# Altium PCB Rev5.PcbDoc (part 3 of 4)
Units mil, origin at the board's own origin, x right, y up, seen from the top; angles counter-clockwise.
Board outline 3019 x 2316 mil, 2 copper layers (Top Layer, Bottom Layer); 26 components, 37 nets, 159 pads, 132 vias.
Unrouted connection lines stored in the file: 2.
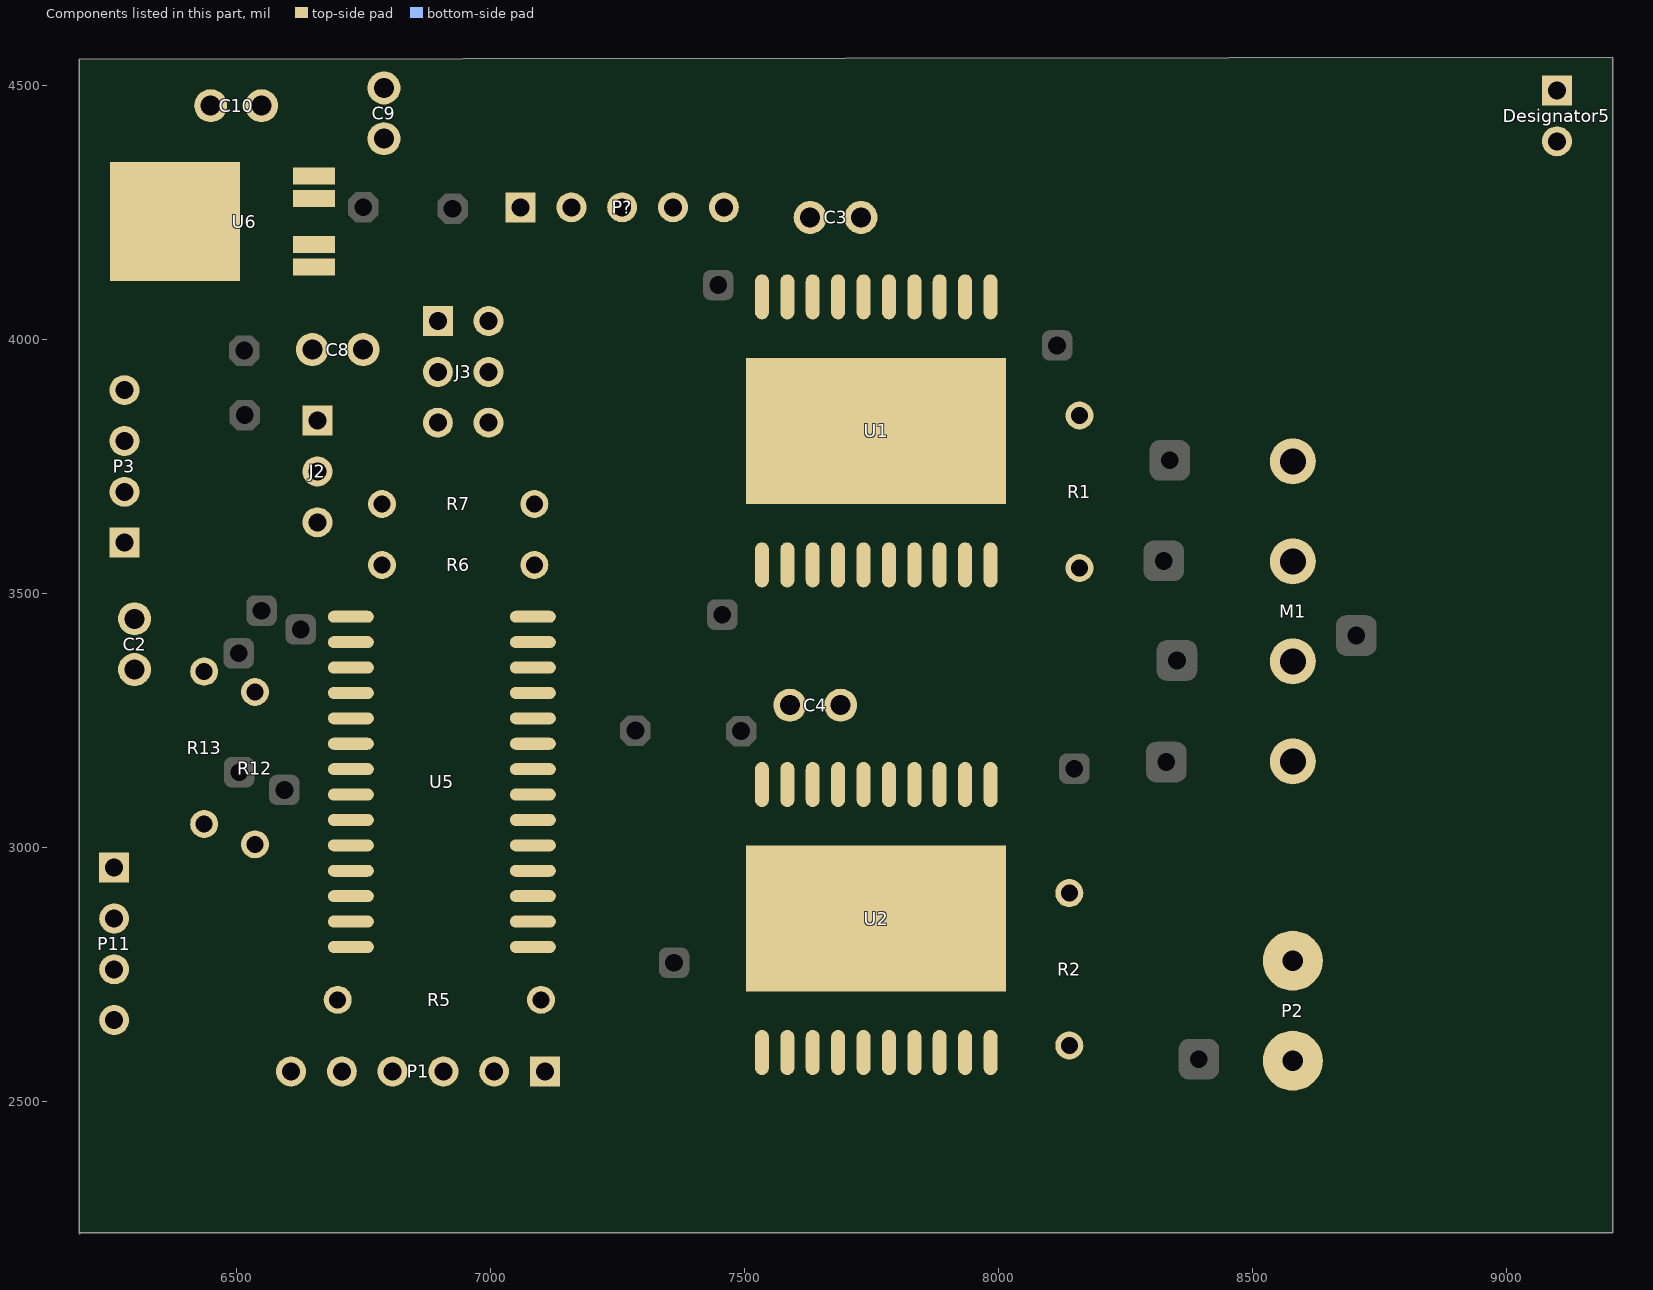
[diagram p3: the components of this part, seen from the top]

## Via types
v1: diameter 25.98, hole 12.99, Top Layer to Bottom Layer, tented top, 132 vias

## Nets (pads, with @x,y where several pads share a name; then routed paths per layer and width w, separated by ;. In a path a pad name is that pad's centre, name@x,y a point inside that pad or via, vN(x,y) a via of type N, cw(c..) or ccw(c..) an arc to the next point about the centre after c; other vN are vias at no path point) (continued)
copper on no net: (continued)
  Bottom Layer w1.3: 8423,3970.4 8636.2,3970.4 ; 8423,3971.7 8636.2,3971.7 ; 8423,3973 8636.2,3973 ; 8423,3974.3 8634.9,3974.3 ; 8423,3975.6 8634.9,3975.6 ; 8423,3976.9 8634.9,3976.9 ; 8423,3978.2 8633.6,3978.2 ; 8423,3979.5 8633.6,3979.5 ; 8423,3980.8 8632.3,3980.8 ; 8423,3982.1 8632.3,3982.1 ; 8423,3983.4 8632.3,3983.4 ; 8423,3984.7 8631,3984.7 ; 8423,3986 8631,3986 ; 8423,3987.3 8631,3987.3 ; 8423,3988.6 8629.7,3988.6 ; 8423,3989.9 8629.7,3989.9 ; 8423,3991.2 8628.4,3991.2 ; 8423,3992.5 8628.4,3992.5 ; 8423,3993.8 8628.4,3993.8 ; 8423,3995.1 8627.1,3995.1 ; 8423,3996.4 8627.1,3996.4 ; 8423,3997.7 8627.1,3997.7 ; 8423,3999 8625.8,3999 ; 8423,4000.3 8625.8,4000.3 ; 8423,4001.6 8624.5,4001.6 ; 8423,4002.9 8624.5,4002.9 ; 8423,4004.2 8624.5,4004.2 ; 8423,4005.5 8623.2,4005.5 ; 8423,4006.8 8623.2,4006.8 ; 8423,4008.1 8621.9,4008.1 ; 8423,4009.4 8621.9,4009.4 ; 8423,4010.7 8621.9,4010.7 ; 8423,4012 8620.6,4012 ; 8423,4013.3 8620.6,4013.3 ; 8423,4014.6 8619.3,4014.6 ; 8423,4015.9 8619.3,4015.9 ; 8423,4017.2 8618,4017.2 ; 8423,4018.5 8618,4018.5 ; 8423,4019.8 8618,4019.8 ; 8423,4021.1 8616.7,4021.1 ; 8423,4022.4 8616.7,4022.4 ; 8423,4023.7 8615.4,4023.7 ; 8423,4025 8615.4,4025 ; 8423,4026.3 8615.4,4026.3 ; 8423,4027.6 8614.1,4027.6 ; 8423,4028.9 8614.1,4028.9 ; 8423,4030.2 8612.8,4030.2 ; 8423,4031.5 8612.8,4031.5 ; 8423,4032.8 8611.5,4032.8 ; 8423,4034.1 8611.5,4034.1 ; 8423,4035.4 8611.5,4035.4 ; 8423,4036.7 8610.2,4036.7 ; 8423,4038 8610.2,4038 ; 8423,4039.3 8608.9,4039.3 ; 8423,4040.6 8607.6,4040.6 ; 8423,4041.9 8607.6,4041.9 ; 8423,4043.2 8606.3,4043.2 ; 8423,4044.5 8606.3,4044.5 ; 8423,4045.8 8606.3,4045.8 ; 8423,4047.1 8605,4047.1 ; 8423,4048.4 8605,4048.4 ; 8423,4049.7 8603.7,4049.7 ; 8423,4051 8603.7,4051 ; 8423,4052.3 8603.7,4052.3 ; 8423,4053.6 8602.4,4053.6 ; 8423,4054.9 8602.4,4054.9 ; 8423,4056.2 8602.4,4056.2 ; 8423,4057.5 8602.4,4057.5 ; 8423,4058.8 8601.1,4058.8 ; 8423,4060.1 8601.1,4060.1 ; 8423,4061.4 8599.8,4061.4 ; 8423,4062.7 8599.8,4062.7 ; 8423,4064 8599.8,4064 ; 8425.6,4065.3 8599.8,4065.3 ; 8428.2,4066.6 8598.5,4066.6 ; 8432.1,4067.9 8598.5,4067.9 ; 8434.7,4069.2 8598.5,4069.2 ; 8439.9,4070.5 8598.5,4070.5 ; 8443.8,4071.8 8597.2,4071.8 ; 8447.7,4073.1 8597.2,4073.1 ; 8451.6,4074.4 8597.2,4074.4 ; 8455.5,4075.7 8597.2,4075.7 ; 8459.4,4077 8597.2,4077 ; 8462,4078.3 8597.2,4078.3 ; 8467.2,4079.6 8597.2,4079.6 ; 8471.1,4080.9 8597.2,4080.9 ; 8475,4082.2 8595.9,4082.2 ; 8480.2,4083.5 8595.9,4083.5 ; 8482.8,4084.8 8595.9,4084.8 ; 8484.1,4348.7 8597.2,4348.7 ; 8484.1,4350 8597.2,4350 ; 8484.1,4351.3 8597.2,4351.3 ; 8484.1,4352.6 8597.2,4352.6 ; 8484.1,4353.9 8597.2,4353.9 ; 8484.1,4355.2 8597.2,4355.2 ; 8484.1,4356.5 8597.2,4356.5 ; 8484.1,4357.8 8597.2,4357.8 ; 8484.1,4359.1 8597.2,4359.1 ; 8484.1,4360.4 8597.2,4360.4 ; 8484.1,4361.7 8597.2,4361.7 ; 8484.1,4363 8597.2,4363 ; 8484.1,4364.3 8597.2,4364.3 ; 8484.1,4365.6 8597.2,4365.6 ; 8484.1,4366.9 8597.2,4366.9 ; 8484.1,4376 8595.9,4376 ; 8484.1,4377.3 8595.9,4377.3 ; 8484.1,4378.6 8595.9,4378.6 ; 8484.1,4379.9 8595.9,4379.9 ; 8485.4,4338.3 8598.5,4338.3 ; 8485.4,4339.6 8598.5,4339.6 ; 8485.4,4340.9 8598.5,4340.9 ; 8485.4,4342.2 8598.5,4342.2 ; 8485.4,4343.5 8598.5,4343.5 ; 8485.4,4344.8 8598.5,4344.8 ; 8485.4,4346.1 8598.5,4346.1 ; 8485.4,4347.4 8597.2,4347.4 ; 8485.4,4368.2 8595.9,4368.2 ; 8485.4,4369.5 8595.9,4369.5 ; 8485.4,4370.8 8595.9,4370.8 ; 8485.4,4372.1 8595.9,4372.1 ; 8485.4,4373.4 8595.9,4373.4 ; 8485.4,4374.7 8595.9,4374.7 ; 8485.4,4381.2 8595.9,4381.2 ; 8485.4,4382.5 8595.9,4382.5 ; 8485.4,4383.8 8595.9,4383.8 ; 8485.4,4385.1 8595.9,4385.1 ; 8485.4,4386.4 8595.9,4386.4 ; 8485.4,4387.7 8595.9,4387.7 ; 8485.4,4389 8595.9,4389 ; 8485.4,4390.3 8595.9,4390.3 ; 8485.4,4391.6 8594.6,4391.6 ; 8485.4,4392.9 8594.6,4392.9 ; 8485.4,4394.2 8593.3,4394.2 ; 8485.4,4395.5 8593.3,4395.5 ; 8486.7,4333.1 8598.5,4333.1 ; 8486.7,4334.4 8598.5,4334.4 ; 8486.7,4335.7 8598.5,4335.7 ; 8486.7,4337 8598.5,4337 ; 8486.7,4396.8 8593.3,4396.8 ; 8486.7,4398.1 8593.3,4398.1 ; 8488,4086.1 8595.9,4086.1 ; 8488,4327.9 8598.5,4327.9 ; 8488,4329.2 8598.5,4329.2 ; 8488,4330.5 8598.5,4330.5 ; 8488,4331.8 8598.5,4331.8 ; 8488,4399.4 8592,4399.4 ; 8488,4400.7 8592,4400.7 ; 8489.3,4318.8 8598.5,4318.8 ; 8489.3,4320.1 8598.5,4320.1 ; 8489.3,4321.4 8598.5,4321.4 ; 8489.3,4322.7 8598.5,4322.7 ; 8489.3,4324 8598.5,4324 ; 8489.3,4325.3 8598.5,4325.3 ; 8489.3,4326.6 8598.5,4326.6 ; 8489.3,4402 8592,4402 ; 8489.3,4403.3 8592,4403.3 ; 8490.6,4087.4 8595.9,4087.4 ; 8490.6,4317.5 8598.5,4317.5 ; 8490.6,4404.6 8592,4404.6 ; 8490.6,4405.9 8593.3,4405.9 ; 8491.9,4307.1 8594.6,4307.1 ; 8491.9,4308.4 8594.6,4308.4 ; 8491.9,4309.7 8595.9,4309.7 ; 8491.9,4311 8595.9,4311 ; 8491.9,4312.3 8597.2,4312.3 ; 8491.9,4313.6 8597.2,4313.6 ; 8491.9,4314.9 8598.5,4314.9 ; 8491.9,4316.2 8598.5,4316.2 ; 8491.9,4407.2 8593.3,4407.2 ; 8491.9,4408.5 8594.6,4408.5 ; 8493.2,4295.4 8590.7,4295.4 ; 8493.2,4296.7 8590.7,4296.7 ; 8493.2,4298 8590.7,4298 ; 8493.2,4299.3 8590.7,4299.3 ; 8493.2,4300.6 8592,4300.6 ; 8493.2,4301.9 8592,4301.9 ; 8493.2,4303.2 8592,4303.2 ; 8493.2,4304.5 8593.3,4304.5 ; 8493.2,4305.8 8593.3,4305.8 ; 8493.2,4409.8 8594.6,4409.8 ; 8493.2,4411.1 8595.9,4411.1 ; 8493.2,4412.4 8598.5,4412.4 ; 8493.2,4413.7 8603.7,4413.7 ; 8493.2,4415 8606.3,4415 ; 8493.2,4416.3 8657,4416.3 ; 8494.5,4291.5 8592,4291.5 ; 8494.5,4292.8 8590.7,4292.8 ; 8494.5,4294.1 8590.7,4294.1 ; 8494.5,4417.6 8659.6,4417.6 ; 8494.5,4418.9 8662.2,4418.9 ; 8494.5,4420.2 8673.9,4420.2 ; 8495.8,4088.7 8594.6,4088.7 ; 8495.8,4277.2 8594.6,4277.2 ; 8495.8,4278.5 8594.6,4278.5 ; 8495.8,4279.8 8594.6,4279.8 ; 8495.8,4281.1 8594.6,4281.1 ; 8495.8,4282.4 8592,4282.4 ; 8495.8,4283.7 8592,4283.7 ; 8495.8,4285 8592,4285 ; 8495.8,4286.3 8592,4286.3 ; 8495.8,4287.6 8592,4287.6 ; 8495.8,4288.9 8592,4288.9 ; 8495.8,4290.2 8592,4290.2 ; 8495.8,4421.5 8679.1,4421.5 ; 8497.1,4269.4 8597.2,4269.4 ; 8497.1,4270.7 8597.2,4270.7 ; 8497.1,4272 8597.2,4272 ; 8497.1,4273.3 8595.9,4273.3 ; 8497.1,4274.6 8595.9,4274.6 ; 8497.1,4275.9 8595.9,4275.9 ; 8497.1,4422.8 8685.6,4422.8 ; 8498.4,4265.5 8597.2,4265.5 ; 8498.4,4266.8 8597.2,4266.8 ; 8498.4,4268.1 8597.2,4268.1 ; 8498.4,4424.1 8693.4,4424.1 ; 8498.4,4425.4 8701.2,4425.4 ; 8498.4,4426.7 8702.5,4426.7 ; 8499.7,4090 8594.6,4090 ; 8499.7,4261.6 8598.5,4261.6 ; 8499.7,4262.9 8598.5,4262.9 ; 8499.7,4264.2 8598.5,4264.2 ; 8499.7,4428 8702.5,4428 ; 8501,4259 8598.5,4259 ; 8501,4260.3 8598.5,4260.3 ; 8501,4429.3 8703.8,4429.3 ; 8501,4430.6 8705.1,4430.6 ; 8502.3,4091.3 8594.6,4091.3 ; 8502.3,4257.7 8599.8,4257.7 ; 8502.3,4431.9 8706.4,4431.9 ; 8502.3,4433.2 8707.7,4433.2 ; 8503.6,4255.1 8599.8,4255.1 ; 8503.6,4256.4 8599.8,4256.4 ; 8503.6,4434.5 8710.3,4434.5 ; 8503.6,4435.8 8714.2,4435.8 ; 8504.9,4246 8519.2,4246 ; 8504.9,4247.3 8520.5,4247.3 ; 8504.9,4248.6 8521.8,4248.6 ; 8504.9,4249.9 8523.1,4249.9 ; 8504.9,4251.2 8524.4,4251.2 ; 8504.9,4252.5 8528.3,4252.5 ; 8504.9,4253.8 8533.5,4253.8 ; 8504.9,4437.1 8733.7,4437.1 ; 8506.2,4092.6 8594.6,4092.6 ; 8506.2,4242.1 8517.9,4242.1 ; 8506.2,4243.4 8517.9,4243.4 ; 8506.2,4244.7 8519.2,4244.7 ; 8506.2,4438.4 8735,4438.4 ; 8507.5,4238.2 8516.6,4238.2 ; 8507.5,4239.5 8516.6,4239.5 ; 8507.5,4240.8 8516.6,4240.8 ; 8507.5,4439.7 8736.3,4439.7 ; 8507.5,4441 8736.3,4441 ; 8508.8,4222.6 8514,4222.6 ; 8508.8,4223.9 8514,4223.9 ; 8508.8,4225.2 8514,4225.2 ; 8508.8,4226.5 8514,4226.5 ; 8508.8,4227.8 8514,4227.8 ; 8508.8,4229.1 8514,4229.1 ; 8508.8,4230.4 8514,4230.4 ; 8508.8,4231.7 8515.3,4231.7 ; 8508.8,4233 8515.3,4233 ; 8508.8,4234.3 8515.3,4234.3 ; 8508.8,4235.6 8515.3,4235.6 ; 8508.8,4236.9 8515.3,4236.9 ; 8510.1,4217.4 8515.3,4217.4 ; 8510.1,4218.7 8515.3,4218.7 ; 8510.1,4220 8515.3,4220 ; 8510.1,4221.3 8515.3,4221.3 ; 8510.1,4442.3 8737.6,4442.3 ; 8511.4,4093.9 8594.6,4093.9 ; 8511.4,4212.2 8517.9,4212.2 ; 8511.4,4213.5 8517.9,4213.5 ; 8511.4,4214.8 8516.6,4214.8 ; 8511.4,4216.1 8516.6,4216.1 ; 8511.4,4443.6 8737.6,4443.6 ; 8511.4,4444.9 8757.1,4444.9 ; 8512.7,4210.9 8517.9,4210.9 ; 8512.7,4446.2 8759.7,4446.2 ; 8514,4095.2 8594.6,4095.2 ; 8514,4208.3 8519.2,4208.3 ; 8514,4209.6 8519.2,4209.6 ; 8514,4447.5 8762.3,4447.5 ; 8515.3,4205.7 8520.5,4205.7 ; 8515.3,4207 8520.5,4207 ; 8515.3,4448.8 8763.6,4448.8 ; 8516.6,4203.1 8521.8,4203.1 ; 8516.6,4204.4 8520.5,4204.4 ; 8516.6,4450.1 8764.9,4450.1 ; 8517.9,4096.5 8594.6,4096.5 ; 8517.9,4200.5 8523.1,4200.5 ; 8517.9,4201.8 8523.1,4201.8 ; 8517.9,4451.4 8767.5,4451.4 ; 8517.9,4452.7 8768.8,4452.7 ; 8519.2,4197.9 8525.7,4197.9 ; 8519.2,4199.2 8524.4,4199.2 ; 8520.5,4195.3 8527,4195.3 ; 8520.5,4196.6 8525.7,4196.6 ; 8520.5,4217.4 8525.7,4217.4 ; 8520.5,4218.7 8525.7,4218.7 ; 8520.5,4220 8525.7,4220 ; 8520.5,4221.3 8525.7,4221.3 ; 8520.5,4222.6 8525.7,4222.6 ; 8520.5,4223.9 8525.7,4223.9 ; 8520.5,4225.2 8525.7,4225.2 ; 8520.5,4226.5 8525.7,4226.5 ; 8520.5,4227.8 8525.7,4227.8 ; 8520.5,4229.1 8525.7,4229.1 ; 8520.5,4230.4 8525.7,4230.4 ; 8520.5,4231.7 8525.7,4231.7 ; 8520.5,4233 8525.7,4233 ; 8520.5,4234.3 8525.7,4234.3 ; 8520.5,4235.6 8527,4235.6 ; 8520.5,4454 8770.1,4454 ; 8521.8,4097.8 8594.6,4097.8 ; 8521.8,4194 8528.3,4194 ; 8521.8,4213.5 8527,4213.5 ; 8521.8,4214.8 8527,4214.8 ; 8521.8,4216.1 8527,4216.1 ; 8521.8,4236.9 8527,4236.9 ; 8521.8,4238.2 8528.3,4238.2 ; 8521.8,4455.3 8771.4,4455.3 ; 8521.8,4456.6 8775.3,4456.6 ; 8521.8,4457.9 8823.4,4457.9 ; 8523.1,4191.4 8529.6,4191.4 ; 8523.1,4192.7 8529.6,4192.7 ; 8523.1,4209.6 8529.6,4209.6 ; 8523.1,4210.9 8528.3,4210.9 ; 8523.1,4212.2 8528.3,4212.2 ; 8523.1,4239.5 8528.3,4239.5 ; 8523.1,4240.8 8529.6,4240.8 ; 8523.1,4459.2 8822.1,4459.2 ; 8523.1,4460.5 8820.8,4460.5 ; 8523.1,4461.8 8820.8,4461.8 ; 8524.4,4099.1 8594.6,4099.1 ; 8524.4,4187.5 8533.5,4187.5 ; 8524.4,4190.1 8530.9,4190.1 ; 8524.4,4208.3 8529.6,4208.3 ; 8524.4,4242.1 8530.9,4242.1 ; 8524.4,4243.4 8532.2,4243.4 ; 8524.4,4463.1 8819.5,4463.1 ; 8524.4,4464.4 8819.5,4464.4 ; 8525.7,4188.8 8532.2,4188.8 ; 8525.7,4205.7 8530.9,4205.7 ; 8525.7,4207 8530.9,4207 ; 8525.7,4244.7 8546.5,4244.7 ; 8525.7,4465.7 8818.2,4465.7 ; 8527,4186.2 8533.5,4186.2 ; 8527,4203.1 8533.5,4203.1 ; 8527,4204.4 8532.2,4204.4 ; 8527,4246 8545.2,4246 ; 8527,4467 8818.2,4467 ; 8528.3,4184.9 8534.8,4184.9 ; 8528.3,4200.5 8534.8,4200.5 ; 8528.3,4201.8 8533.5,4201.8 ; 8528.3,4468.3 8816.9,4468.3 ; 8529.6,4100.4 8594.6,4100.4 ; 8529.6,4183.6 8536.1,4183.6 ; 8529.6,4199.2 8536.1,4199.2 ; 8529.6,4247.3 8542.6,4247.3 ; 8529.6,4469.6 8815.6,4469.6 ; 8530.9,4181 8538.7,4181 ; 8530.9,4182.3 8537.4,4182.3 ; 8530.9,4197.9 8537.4,4197.9 ; 8530.9,4473.5 8532.2,4473.5 ; 8532.2,4194 8540,4194 ; 8532.2,4196.6 8537.4,4196.6 ; 8532.2,4234.3 8541.3,4234.3 ; 8532.2,4470.9 8814.3,4470.9 ; 8532.2,4472.2 8813,4472.2 ; 8533.5,4101.7 8594.6,4101.7 ; 8533.5,4179.7 8540,4179.7 ; 8533.5,4195.3 8538.7,4195.3 ; 8533.5,4235.6 8542.6,4235.6 ; 8534.8,4178.4 8541.3,4178.4 ; 8534.8,4192.7 8541.3,4192.7 ; 8534.8,4248.6 8540,4248.6 ; 8534.8,4473.5 8811.7,4473.5 ; 8536.1,4177.1 8542.6,4177.1 ; 8536.1,4191.4 8543.9,4191.4 ; 8536.1,4236.9 8546.5,4236.9 ; 8536.1,4243.4 8537.4,4243.4 ; 8536.1,4474.8 8810.4,4474.8 ; 8537.4,4103 8594.6,4103 ; 8537.4,4174.5 8546.5,4174.5 ; 8537.4,4175.8 8543.9,4175.8 ; 8537.4,4190.1 8543.9,4190.1 ; 8537.4,4476.1 8809.1,4476.1 ; 8537.4,4477.4 8807.8,4477.4 ; 8538.7,4188.8 8545.2,4188.8 ; 8538.7,4243.4 8547.8,4243.4 ; 8538.7,4253.8 8599.8,4253.8 ; 8538.7,4478.7 8807.8,4478.7 ; 8540,4173.2 8547.8,4173.2 ; 8540,4238.2 8547.8,4238.2 ; 8540,4480 8807.8,4480 ; 8541.3,4171.9 8549.1,4171.9 ; 8541.3,4186.2 8547.8,4186.2 ; 8541.3,4187.5 8546.5,4187.5 ; 8542.6,4104.3 8594.6,4104.3 ; 8542.6,4170.6 8550.4,4170.6 ; 8542.6,4239.5 8547.8,4239.5 ; 8542.6,4240.8 8547.8,4240.8 ; 8542.6,4242.1 8547.8,4242.1 ; 8542.6,4481.3 8806.5,4481.3 ; 8543.9,4183.6 8550.4,4183.6 ; 8543.9,4184.9 8549.1,4184.9 ; 8545.2,4105.6 8595.9,4105.6 ; 8545.2,4169.3 8553,4169.3 ; 8545.2,4252.5 8599.8,4252.5 ; 8545.2,4482.6 8806.5,4482.6 ; 8546.5,4168 8556.9,4168 ; 8546.5,4182.3 8554.3,4182.3 ; 8547.8,4166.7 8559.5,4166.7 ; 8547.8,4181 8558.2,4181 ; 8547.8,4212.2 8549.1,4212.2 ; 8547.8,4251.2 8601.1,4251.2 ; 8547.8,4483.9 8805.2,4483.9 ; 8549.1,4106.9 8595.9,4106.9 ; 8549.1,4165.4 8562.1,4165.4 ; 8549.1,4179.7 8559.5,4179.7 ; 8549.1,4213.5 8551.7,4213.5 ; 8549.1,4214.8 8553,4214.8 ; 8549.1,4222.6 8550.4,4222.6 ; 8549.1,4485.2 8805.2,4485.2 ; 8550.4,4216.1 8555.6,4216.1 ; 8550.4,4217.4 8556.9,4217.4 ; 8550.4,4249.9 8601.1,4249.9 ; 8550.4,4486.5 8803.9,4486.5 ; 8551.7,4218.7 8559.5,4218.7 ; 8551.7,4248.6 8601.1,4248.6 ; 8551.7,4487.8 8803.9,4487.8 ; 8553,4108.2 8595.9,4108.2 ; 8553,4164.1 8563.4,4164.1 ; 8553,4178.4 8563.4,4178.4 ; 8553,4220 8568.6,4220 ; 8553,4247.3 8602.4,4247.3 ; 8553,4489.1 8802.6,4489.1 ; 8554.3,4244.7 8603.7,4244.7 ; 8554.3,4246 8602.4,4246 ; 8554.3,4490.4 8801.3,4490.4 ; 8555.6,4162.8 8566,4162.8 ; 8555.6,4177.1 8575.1,4177.1 ; 8555.6,4221.3 8567.3,4221.3 ; 8556.9,4222.6 8566,4222.6 ; 8556.9,4242.1 8603.7,4242.1 ; 8556.9,4243.4 8603.7,4243.4 ; 8558.2,4109.5 8595.9,4109.5 ; 8558.2,4161.5 8568.6,4161.5 ; 8558.2,4175.8 8573.8,4175.8 ; 8558.2,4240.8 8603.7,4240.8 ; 8558.2,4491.7 8801.3,4491.7 ; 8559.5,4223.9 8564.7,4223.9 ; 8559.5,4238.2 8605,4238.2 ; 8559.5,4239.5 8605,4239.5 ; 8560.8,4110.8 8595.9,4110.8 ; 8560.8,4160.2 8568.6,4160.2 ; 8560.8,4218.7 8569.9,4218.7 ; 8560.8,4493 8800,4493 ; 8562.1,4158.9 8571.2,4158.9 ; 8562.1,4174.5 8572.5,4174.5 ; 8562.1,4217.4 8563.4,4217.4 ; 8562.1,4236.9 8605,4236.9 ; 8563.4,4112.1 8594.6,4112.1 ; 8563.4,4235.6 8606.3,4235.6 ; 8564.7,4157.6 8572.5,4157.6 ; 8564.7,4208.3 8569.9,4208.3 ; 8564.7,4212.2 8569.9,4212.2 ; 8564.7,4216.1 8569.9,4216.1 ; 8564.7,4217.4 8569.9,4217.4 ; 8564.7,4225.2 8566,4225.2 ; 8564.7,4234.3 8606.3,4234.3 ; 8564.7,4494.3 8798.7,4494.3 ; 8566,4156.3 8573.8,4156.3 ; 8566,4203.1 8572.5,4203.1 ; 8566,4204.4 8571.2,4204.4 ; 8566,4205.7 8571.2,4205.7 ; 8566,4207 8569.9,4207 ; 8566,4209.6 8569.9,4209.6 ; 8566,4210.9 8569.9,4210.9 ; 8566,4213.5 8569.9,4213.5 ; 8566,4214.8 8569.9,4214.8 ; 8566,4223.9 8567.3,4223.9 ; 8566,4233 8606.3,4233 ; 8567.3,4155 8575.1,4155 ; 8567.3,4173.2 8569.9,4173.2 ; 8567.3,4201.8 8573.8,4201.8 ; 8567.3,4231.7 8606.3,4231.7 ; 8567.3,4495.6 8797.4,4495.6 ; 8568.6,4113.4 8595.9,4113.4 ; 8568.6,4200.5 8575.1,4200.5 ; 8568.6,4230.4 8606.3,4230.4 ; 8569.9,4153.7 8576.4,4153.7 ; 8569.9,4178.4 8577.7,4178.4 ; 8569.9,4179.7 8571.2,4179.7 ; 8569.9,4197.9 8586.8,4197.9 ; 8569.9,4199.2 8585.5,4199.2 ; 8569.9,4229.1 8607.6,4229.1 ; 8569.9,4496.9 8796.1,4496.9 ; 8571.2,4114.7 8595.9,4114.7 ; 8571.2,4152.4 8576.4,4152.4 ; 8571.2,4227.8 8607.6,4227.8 ; 8571.2,4498.2 8794.8,4498.2 ; 8572.5,4151.1 8579,4151.1 ; 8572.5,4179.7 8579,4179.7 ; 8572.5,4226.5 8608.9,4226.5 ; 8573.8,4149.8 8582.9,4149.8 ; 8573.8,4181 8580.3,4181 ; 8573.8,4196.6 8579,4196.6 ; 8573.8,4223.9 8608.9,4223.9 ; 8573.8,4225.2 8608.9,4225.2 ; 8573.8,4499.5 8793.5,4499.5 ; 8575.1,4148.5 8603.7,4148.5 ; 8575.1,4182.3 8582.9,4182.3 ; 8575.1,4222.6 8608.9,4222.6 ; 8575.1,4500.8 8792.2,4500.8 ; 8576.4,4116 8595.9,4116 ; 8576.4,4183.6 8584.2,4183.6 ; 8576.4,4502.1 8790.9,4502.1 ; 8577.7,4147.2 8603.7,4147.2 ; 8577.7,4184.9 8584.2,4184.9 ; 8577.7,4220 8610.2,4220 ; 8577.7,4221.3 8610.2,4221.3 ; 8579,4117.3 8595.9,4117.3 ; 8579,4186.2 8585.5,4186.2 ; 8579,4200.5 8585.5,4200.5 ; 8579,4218.7 8610.2,4218.7 ; 8579,4503.4 8789.6,4503.4 ; 8580.3,4121.2 8581.6,4121.2 ; 8580.3,4187.5 8585.5,4187.5 ; 8580.3,4192.7 8586.8,4192.7 ; 8580.3,4194 8586.8,4194 ; 8580.3,4195.3 8586.8,4195.3 ; 8580.3,4196.6 8586.8,4196.6 ; 8580.3,4201.8 8586.8,4201.8 ; 8580.3,4217.4 8610.2,4217.4 ; 8581.6,4118.6 8602.4,4118.6 ; 8581.6,4188.8 8585.5,4188.8 ; 8581.6,4190.1 8586.8,4190.1 ; 8581.6,4191.4 8586.8,4191.4 ; 8581.6,4216.1 8610.2,4216.1 ; 8582.9,4203.1 8584.2,4203.1 ; 8582.9,4213.5 8610.2,4213.5 ; 8582.9,4214.8 8610.2,4214.8 ; 8584.2,4212.2 8610.2,4212.2 ; 8584.2,4504.7 8787,4504.7 ; 8585.5,4119.9 8602.4,4119.9 ; 8585.5,4210.9 8610.2,4210.9 ; 8586.8,4208.3 8610.2,4208.3 ; 8586.8,4209.6 8610.2,4209.6 ; 8586.8,4506 8784.4,4506 ; 8588.1,4121.2 8601.1,4121.2 ; 8588.1,4145.9 8602.4,4145.9 ; 8588.1,4207 8608.9,4207 ; 8589.4,4122.5 8601.1,4122.5 ; 8589.4,4204.4 8607.6,4204.4 ; 8589.4,4205.7 8608.9,4205.7 ; 8589.4,4507.3 8781.8,4507.3 ; 8590.7,4149.8 8605,4149.8 ; 8590.7,4203.1 8607.6,4203.1 ; 8590.7,4508.6 8779.2,4508.6 ; 8592,4123.8 8601.1,4123.8 ; 8592,4200.5 8606.3,4200.5 ; 8592,4201.8 8607.6,4201.8 ; 8593.3,4125.1 8601.1,4125.1 ; 8593.3,4199.2 8606.3,4199.2 ; 8593.3,4509.9 8777.9,4509.9 ; 8594.6,4126.4 8601.1,4126.4 ; 8594.6,4196.6 8603.7,4196.6 ; 8594.6,4197.9 8605,4197.9 ; 8595.9,4127.7 8601.1,4127.7 ; 8595.9,4129 8601.1,4129 ; 8595.9,4144.6 8602.4,4144.6 ; 8595.9,4194 8601.1,4194 ; 8595.9,4195.3 8601.1,4195.3 ; 8597.2,4110.8 8602.4,4110.8 ; 8597.2,4112.1 8602.4,4112.1 ; 8597.2,4113.4 8602.4,4113.4 ; 8597.2,4114.7 8602.4,4114.7 ; 8597.2,4116 8602.4,4116 ; 8597.2,4117.3 8602.4,4117.3 ; 8597.2,4130.3 8601.1,4130.3 ; 8597.2,4131.6 8601.1,4131.6 ; 8597.2,4132.9 8601.1,4132.9 ; 8597.2,4134.2 8601.1,4134.2 ; 8597.2,4135.5 8601.1,4135.5 ; 8597.2,4136.8 8602.4,4136.8 ; 8597.2,4138.1 8602.4,4138.1 ; 8597.2,4139.4 8602.4,4139.4 ; 8597.2,4140.7 8602.4,4140.7 ; 8597.2,4142 8602.4,4142 ; 8597.2,4143.3 8602.4,4143.3 ; 8597.2,4151.1 8605,4151.1 ; 8597.2,4191.4 8602.4,4191.4 ; 8597.2,4192.7 8602.4,4192.7 ; 8597.2,4511.2 8776.6,4511.2 ; 8598.5,4103 8603.7,4103 ; 8598.5,4104.3 8603.7,4104.3 ; 8598.5,4105.6 8603.7,4105.6 ; 8598.5,4106.9 8603.7,4106.9 ; 8598.5,4108.2 8602.4,4108.2 ; 8598.5,4109.5 8602.4,4109.5 ; 8598.5,4152.4 8605,4152.4 ; 8598.5,4187.5 8603.7,4187.5 ; 8598.5,4188.8 8603.7,4188.8 ; 8598.5,4190.1 8603.7,4190.1 ; 8599.8,4096.5 8605,4096.5 ; 8599.8,4097.8 8605,4097.8 ; 8599.8,4099.1 8605,4099.1 ; 8599.8,4100.4 8605,4100.4 ; 8599.8,4101.7 8605,4101.7 ; 8599.8,4153.7 8605,4153.7 ; 8599.8,4155 8606.3,4155 ; 8599.8,4156.3 8607.6,4156.3 ; 8599.8,4186.2 8605,4186.2 ; 8599.8,4512.5 8775.3,4512.5 ; 8601.1,4092.6 8607.6,4092.6 ; 8601.1,4093.9 8606.3,4093.9 ; 8601.1,4095.2 8606.3,4095.2 ; 8601.1,4157.6 8607.6,4157.6 ; 8601.1,4158.9 8607.6,4158.9 ; 8601.1,4160.2 8607.6,4160.2 ; 8601.1,4161.5 8607.6,4161.5 ; 8601.1,4182.3 8606.3,4182.3 ; 8601.1,4183.6 8606.3,4183.6 ; 8601.1,4184.9 8605,4184.9 ; 8602.4,4090 8608.9,4090 ; 8602.4,4091.3 8607.6,4091.3 ; 8602.4,4162.8 8614.1,4162.8 ; 8602.4,4164.1 8612.8,4164.1 ; 8602.4,4165.4 8612.8,4165.4 ; 8602.4,4166.7 8612.8,4166.7 ; 8602.4,4168 8611.5,4168 ; 8602.4,4169.3 8611.5,4169.3 ; 8602.4,4170.6 8611.5,4170.6 ; 8602.4,4178.4 8607.6,4178.4 ; 8602.4,4179.7 8607.6,4179.7 ; 8602.4,4181 8607.6,4181 ; 8603.7,4087.4 8610.2,4087.4 ; 8603.7,4088.7 8610.2,4088.7 ; 8603.7,4171.9 8610.2,4171.9 ; 8603.7,4173.2 8610.2,4173.2 ; 8603.7,4174.5 8610.2,4174.5 ; 8603.7,4175.8 8608.9,4175.8 ; 8603.7,4177.1 8608.9,4177.1 ; 8605,4079.6 8606.3,4079.6 ; 8605,4086.1 8611.5,4086.1 ; 8605,4513.8 8774,4513.8 ; 8606.3,4082.2 8612.8,4082.2 ; 8606.3,4083.5 8612.8,4083.5 ; 8606.3,4084.8 8611.5,4084.8 ; 8607.6,4080.9 8614.1,4080.9 ; 8607.6,4197.9 8608.9,4197.9 ; 8607.6,4515.1 8772.7,4515.1 ; 8608.9,4078.3 8615.4,4078.3 ; 8608.9,4079.6 8615.4,4079.6 ; 8608.9,4158.9 8615.4,4158.9 ; 8608.9,4160.2 8615.4,4160.2 ; 8608.9,4161.5 8614.1,4161.5 ; 8610.2,4077 8616.7,4077 ; 8610.2,4155 8616.7,4155 ; 8610.2,4156.3 8615.4,4156.3 ; 8610.2,4157.6 8615.4,4157.6 ; 8610.2,4415 8651.8,4415 ; 8610.2,4516.4 8772.7,4516.4 ; 8611.5,4074.4 8619.3,4074.4 ; 8611.5,4075.7 8618,4075.7 ; 8611.5,4151.1 8616.7,4151.1 ; 8611.5,4152.4 8616.7,4152.4 ; 8611.5,4153.7 8616.7,4153.7 ; 8612.8,4073.1 8619.3,4073.1 ; 8612.8,4144.6 8618,4144.6 ; 8612.8,4145.9 8618,4145.9 ; 8612.8,4147.2 8618,4147.2 ; 8612.8,4148.5 8618,4148.5 ; 8612.8,4149.8 8618,4149.8 ; 8614.1,4071.8 8620.6,4071.8 ; 8614.1,4140.7 8619.3,4140.7 ; 8614.1,4142 8619.3,4142 ; 8614.1,4143.3 8619.3,4143.3 ; 8615.4,4069.2 8623.2,4069.2 ; 8615.4,4070.5 8621.9,4070.5 ; 8615.4,4138.1 8620.6,4138.1 ; 8615.4,4139.4 8619.3,4139.4 ; 8616.7,4067.9 8624.5,4067.9 ; 8616.7,4134.2 8620.6,4134.2 ; 8616.7,4135.5 8620.6,4135.5 ; 8616.7,4136.8 8620.6,4136.8 ; 8616.7,4517.7 8771.4,4517.7 ; 8618,4066.6 8624.5,4066.6 ; 8618,4131.6 8621.9,4131.6 ; 8618,4132.9 8621.9,4132.9 ; 8619.3,4065.3 8627.1,4065.3 ; 8619.3,4129 8623.2,4129 ; 8619.3,4130.3 8623.2,4130.3 ; 8620.6,4064 8627.1,4064 ; 8620.6,4126.4 8624.5,4126.4 ; 8620.6,4127.7 8624.5,4127.7 ; 8621.9,4062.7 8628.4,4062.7 ; 8621.9,4118.6 8623.2,4118.6 ; 8621.9,4123.8 8625.8,4123.8 ; 8621.9,4125.1 8625.8,4125.1 ; 8623.2,4061.4 8629.7,4061.4 ; 8623.2,4121.2 8628.4,4121.2 ; 8623.2,4122.5 8627.1,4122.5 ; 8624.5,4058.8 8632.3,4058.8 ; 8624.5,4060.1 8631,4060.1 ; 8624.5,4119.9 8628.4,4119.9 ; 8624.5,4519 8771.4,4519 ; 8625.8,4053.6 8627.1,4053.6 ; 8625.8,4057.5 8633.6,4057.5 ; 8625.8,4118.6 8629.7,4118.6 ; 8627.1,4056.2 8633.6,4056.2 ; 8627.1,4116 8632.3,4116 ; 8627.1,4117.3 8631,4117.3 ; 8628.4,4054.9 8634.9,4054.9 ; 8628.4,4114.7 8633.6,4114.7 ; 8628.4,4520.3 8770.1,4520.3 ; 8629.7,4053.6 8636.2,4053.6 ; 8629.7,4113.4 8634.9,4113.4 ; 8631,4052.3 8637.5,4052.3 ; 8631,4112.1 8636.2,4112.1 ; 8632.3,4051 8640.1,4051 ; 8632.3,4110.8 8637.5,4110.8 ; 8633.6,4049.7 8641.4,4049.7 ; 8634.9,4048.4 8642.7,4048.4 ; 8634.9,4109.5 8638.8,4109.5 ; 8636.2,4047.1 8642.7,4047.1 ; 8636.2,4108.2 8638.8,4108.2 ; 8636.2,4521.6 8768.8,4521.6 ; 8637.5,4045.8 8645.3,4045.8 ; 8638.8,4044.5 8646.6,4044.5 ; 8638.8,4106.9 8640.1,4106.9 ; 8640.1,4043.2 8647.9,4043.2 ; 8641.4,4041.9 8650.5,4041.9 ; 8641.4,4522.9 8766.2,4522.9 ; 8642.7,4038 8644,4038 ; 8642.7,4040.6 8651.8,4040.6 ; 8642.7,4524.2 8763.6,4524.2 ; 8644,4039.3 8654.4,4039.3 ; 8645.3,4038 8654.4,4038 ; 8645.3,4525.5 8762.3,4525.5 ; 8646.6,4036.7 8657,4036.7 ; 8649.2,4035.4 8658.3,4035.4 ; 8650.5,4034.1 8660.9,4034.1 ; 8653.1,4032.8 8662.2,4032.8 ; 8653.1,4526.8 8759.7,4526.8 ; 8654.4,4031.5 8664.8,4031.5 ; 8654.4,4264.2 8655.7,4264.2 ; 8654.4,4265.5 8657,4265.5 ; 8654.4,4266.8 8658.3,4266.8 ; 8655.7,4268.1 8658.3,4268.1 ; 8655.7,4269.4 8659.6,4269.4 ; 8655.7,4270.7 8660.9,4270.7 ; 8655.7,4272 8660.9,4272 ; 8657,4030.2 8667.4,4030.2 ; 8657,4273.3 8662.2,4273.3 ; 8657,4274.6 8663.5,4274.6 ; 8658.3,4028.9 8668.7,4028.9 ; 8658.3,4275.9 8664.8,4275.9 ; 8658.3,4277.2 8667.4,4277.2 ; 8658.3,4528.1 8758.4,4528.1 ; 8659.6,4027.6 8672.6,4027.6 ; 8659.6,4278.5 8668.7,4278.5 ; 8659.6,4279.8 8670,4279.8 ; 8659.6,4281.1 8671.3,4281.1 ; 8660.9,4282.4 8673.9,4282.4 ; 8660.9,4283.7 8675.2,4283.7 ; 8662.2,4285 8677.8,4285 ; 8662.2,4286.3 8680.4,4286.3 ; 8663.5,4026.3 8675.2,4026.3 ; 8663.5,4287.6 8683,4287.6 ; 8663.5,4288.9 8685.6,4288.9 ; 8664.8,4025 8677.8,4025 ; 8664.8,4290.2 8689.5,4290.2 ; 8666.1,4291.5 8692.1,4291.5 ; 8666.1,4292.8 8698.6,4292.8 ; 8666.1,4529.4 8754.5,4529.4 ; 8667.4,4023.7 8679.1,4023.7 ; 8667.4,4294.1 8757.1,4294.1 ; 8668.7,4295.4 8772.7,4295.4 ; 8670,4022.4 8681.7,4022.4 ; 8670,4296.7 8772.7,4296.7 ; 8670,4530.7 8751.9,4530.7 ; 8671.3,4021.1 8683,4021.1 ; 8671.3,4298 8772.7,4298 ; 8671.3,4299.3 8772.7,4299.3 ; 8672.6,4265.5 8706.4,4265.5 ; 8672.6,4266.8 8683,4266.8 ; 8672.6,4268.1 8679.1,4268.1 ; 8672.6,4269.4 8681.7,4269.4 ; 8672.6,4300.6 8772.7,4300.6 ; 8672.6,4532 8748,4532 ; 8673.9,4019.8 8685.6,4019.8 ; 8673.9,4264.2 8699.9,4264.2 ; 8673.9,4270.7 8683,4270.7 ; 8675.2,4272 8684.3,4272 ; 8675.2,4301.9 8772.7,4301.9 ; 8676.5,4018.5 8686.9,4018.5 ; 8676.5,4303.2 8771.4,4303.2 ; 8677.8,4262.9 8693.4,4262.9 ; 8677.8,4273.3 8685.6,4273.3 ; 8679.1,4017.2 8689.5,4017.2 ; 8679.1,4274.6 8689.5,4274.6 ; 8679.1,4304.5 8771.4,4304.5 ; 8680.4,4015.9 8692.1,4015.9 ; 8680.4,4275.9 8693.4,4275.9 ; 8680.4,4305.8 8771.4,4305.8 ; 8683,3970.4 8702.5,3970.4 ; 8683,3971.7 8701.2,3971.7 ; 8683,3973 8699.9,3973 ; 8683,4014.6 8693.4,4014.6 ; 8683,4277.2 8724.6,4277.2 ; 8684.3,3974.3 8699.9,3974.3 ; 8684.3,3975.6 8699.9,3975.6 ; 8684.3,4013.3 8696,4013.3 ; 8684.3,4270.7 8685.6,4270.7 ; 8684.3,4307.1 8771.4,4307.1 ; 8685.6,3976.9 8699.9,3976.9 ; 8685.6,4278.5 8724.6,4278.5 ; 8685.6,4533.3 8703.8,4533.3 ; 8686.9,3978.2 8698.6,3978.2 ; 8686.9,3979.5 8699.9,3979.5 ; 8686.9,3980.8 8701.2,3980.8 ; 8686.9,4012 8697.3,4012 ; 8686.9,4266.8 8710.3,4266.8 ; 8686.9,4308.4 8770.1,4308.4 ; 8688.2,3982.1 8701.2,3982.1 ; 8688.2,3983.4 8701.2,3983.4 ; 8688.2,4279.8 8724.6,4279.8 ; 8689.5,3984.7 8701.2,3984.7 ; 8689.5,3986 8701.2,3986 ; 8689.5,4010.7 8699.9,4010.7 ; 8689.5,4281.1 8724.6,4281.1 ; 8689.5,4534.6 8693.4,4534.6 ; 8690.8,3987.3 8702.5,3987.3 ; 8690.8,3988.6 8703.8,3988.6 ; 8690.8,3989.9 8707.7,3989.9 ; 8690.8,4009.4 8701.2,4009.4 ; 8692.1,3991.2 9027.5,3991.2 ; 8693.4,3992.5 9027.5,3992.5 ; 8693.4,3993.8 9027.5,3993.8 ; 8693.4,4008.1 8702.5,4008.1 ; 8693.4,4282.4 8724.6,4282.4 ; 8693.4,4309.7 8724.6,4309.7 ; 8694.7,3995.1 9027.5,3995.1 ; 8694.7,3996.4 9027.5,3996.4 ; 8694.7,4006.8 8702.5,4006.8 ; 8694.7,4268.1 8714.2,4268.1 ; 8696,3997.7 9027.5,3997.7 ; 8696,3999 9027.5,3999 ; 8696,4005.5 8703.8,4005.5 ; 8696,4283.7 8723.3,4283.7 ; 8697.3,4000.3 8714.2,4000.3 ; 8697.3,4001.6 8707.7,4001.6 ; 8697.3,4002.9 8703.8,4002.9 ; 8697.3,4004.2 8703.8,4004.2 ; 8697.3,4274.6 8732.4,4274.6 ; 8697.3,4275.9 8733.7,4275.9 ; 8698.6,4269.4 8720.7,4269.4 ; 8698.6,4272 8725.9,4272 ; 8698.6,4273.3 8729.8,4273.3 ; 8699.9,4270.7 8724.6,4270.7 ; 8699.9,4285 8724.6,4285 ; 8703.8,4286.3 8737.6,4286.3 ; 8705.1,4287.6 8736.3,4287.6 ; 8707.7,4246 8712.9,4246 ; 8710.3,4247.3 8716.8,4247.3 ; 8711.6,4288.9 8732.4,4288.9 ; 8712.9,3989.9 8714.2,3989.9 ; 8714.2,4248.6 8719.4,4248.6 ; 8715.5,4249.9 8722,4249.9 ; 8715.5,4533.3 8737.6,4533.3 ; 8716.8,3989.9 9027.5,3989.9 ; 8716.8,4251.2 8723.3,4251.2 ; 8719.4,4252.5 8727.2,4252.5 ; 8719.4,4253.8 8720.7,4253.8 ; 8719.4,4435.8 8731.1,4435.8 ; 8722,4253.8 8727.2,4253.8 ; 8723.3,4255.1 8728.5,4255.1 ; 8724.6,3988.6 8750.6,3988.6 ; 8724.6,4071.8 8735,4071.8 ; 8724.6,4073.1 8727.2,4073.1 ; 8724.6,4256.4 8729.8,4256.4 ; 8725.9,4257.7 8731.1,4257.7 ; 8725.9,4278.5 8727.2,4278.5 ; 8727.2,4070.5 8740.2,4070.5 ; 8727.2,4277.2 8740.2,4277.2 ; 8728.5,4259 8732.4,4259 ; 8728.5,4278.5 8740.2,4278.5 ; 8728.5,4285 8738.9,4285 ; 8729.8,4069.2 8744.1,4069.2 ; 8729.8,4168 8731.1,4168 ; 8729.8,4169.3 8731.1,4169.3 ; 8729.8,4170.6 8731.1,4170.6 ; 8729.8,4171.9 8731.1,4171.9 ; 8729.8,4173.2 8731.1,4173.2 ; 8729.8,4174.5 8732.4,4174.5 ; 8729.8,4175.8 8732.4,4175.8 ; 8729.8,4177.1 8732.4,4177.1 ; 8729.8,4178.4 8733.7,4178.4 ; 8729.8,4260.3 8733.7,4260.3 ; 8729.8,4279.8 8740.2,4279.8 ; 8729.8,4281.1 8740.2,4281.1 ; 8731.1,4179.7 8735,4179.7 ; 8731.1,4181 8735,4181 ; 8731.1,4261.6 8733.7,4261.6 ; 8731.1,4262.9 8735,4262.9 ; 8731.1,4264.2 8735,4264.2 ; 8731.1,4282.4 8740.2,4282.4 ; 8731.1,4283.7 8738.9,4283.7 ; 8731.1,4292.8 8748,4292.8 ; 8732.4,4182.3 8736.3,4182.3 ; 8732.4,4265.5 8736.3,4265.5 ; 8733.7,4067.9 8746.7,4067.9 ; 8733.7,4183.6 8736.3,4183.6 ; 8733.7,4266.8 8737.6,4266.8 ; 8733.7,4268.1 8737.6,4268.1 ; 8735,4184.9 8737.6,4184.9 ; 8735,4269.4 8737.6,4269.4 ; 8735,4270.7 8738.9,4270.7 ; 8735,4272 8738.9,4272 ; 8735,4273.3 8738.9,4273.3 ; 8735,4275.9 8740.2,4275.9 ; 8736.3,4181 8737.6,4181 ; 8736.3,4186.2 8738.9,4186.2 ; 8736.3,4187.5 8740.2,4187.5 ; 8736.3,4274.6 8740.2,4274.6 ; 8737.6,4066.6 8772.7,4066.6 ; 8737.6,4188.8 8741.5,4188.8 ; 8737.6,4190.1 8741.5,4190.1 ; 8738.9,3987.3 8749.3,3987.3 ; 8738.9,4191.4 8742.8,4191.4 ; 8738.9,4309.7 8770.1,4309.7 ; 8740.2,3986 8750.6,3986 ; 8740.2,4065.3 8774,4065.3 ; 8740.2,4192.7 8744.1,4192.7 ; 8741.5,4194 8745.4,4194 ; 8741.5,4195.3 8745.4,4195.3 ; 8742.8,3984.7 8750.6,3984.7 ; 8742.8,4196.6 8746.7,4196.6 ; 8742.8,4197.9 8746.7,4197.9 ; 8744.1,3983.4 8751.9,3983.4 ; 8744.1,4064 8776.6,4064 ; 8744.1,4155 8757.1,4155 ; 8744.1,4156.3 8758.4,4156.3 ; 8744.1,4157.6 8759.7,4157.6 ; 8744.1,4158.9 8762.3,4158.9 ; 8744.1,4160.2 8763.6,4160.2 ; 8744.1,4161.5 8766.2,4161.5 ; 8744.1,4162.8 8767.5,4162.8 ; 8744.1,4164.1 8770.1,4164.1 ; 8744.1,4165.4 8771.4,4165.4 ; 8744.1,4166.7 8772.7,4166.7 ; 8744.1,4168 8775.3,4168 ; 8744.1,4169.3 8776.6,4169.3 ; 8744.1,4199.2 8748,4199.2 ; 8744.1,4443.6 8754.5,4443.6 ; 8745.4,4144.6 8750.6,4144.6 ; 8745.4,4145.9 8751.9,4145.9 ; 8745.4,4147.2 8751.9,4147.2 ; 8745.4,4148.5 8753.2,4148.5 ; 8745.4,4149.8 8753.2,4149.8 ; 8745.4,4151.1 8754.5,4151.1 ; 8745.4,4152.4 8754.5,4152.4 ; 8745.4,4153.7 8755.8,4153.7 ; 8745.4,4170.6 8779.2,4170.6 ; 8745.4,4171.9 8783.1,4171.9 ; 8745.4,4200.5 8749.3,4200.5 ; 8745.4,4201.8 8750.6,4201.8 ; 8746.7,3980.8 8754.5,3980.8 ; 8746.7,3982.1 8753.2,3982.1 ; 8746.7,4142 8749.3,4142 ; 8746.7,4143.3 8750.6,4143.3 ; 8746.7,4173.2 8785.7,4173.2 ; 8746.7,4203.1 8750.6,4203.1 ; 8746.7,4204.4 8750.6,4204.4 ; 8746.7,4442.3 8750.6,4442.3 ; 8748,3978.2 8755.8,3978.2 ; 8748,3979.5 8754.5,3979.5 ; 8748,4062.7 8779.2,4062.7 ; 8748,4067.9 8749.3,4067.9 ; 8748,4140.7 8749.3,4140.7 ; 8748,4174.5 8788.3,4174.5 ; 8748,4205.7 8751.9,4205.7 ; 8748,4207 8751.9,4207 ; 8749.3,3975.6 8758.4,3975.6 ; 8749.3,3976.9 8757.1,3976.9 ; 8749.3,4000.3 9027.5,4000.3 ; 8749.3,4075.7 8762.3,4075.7 ; 8749.3,4077 8762.3,4077 ; 8749.3,4175.8 8789.6,4175.8 ; 8749.3,4208.3 8753.2,4208.3 ; 8749.3,4209.6 8753.2,4209.6 ; 8749.3,4210.9 8754.5,4210.9 ; 8750.6,3970.4 8762.3,3970.4 ; 8750.6,3971.7 8762.3,3971.7 ; 8750.6,3973 8761,3973 ; 8750.6,3974.3 8759.7,3974.3 ; 8750.6,4061.4 9004.1,4061.4 ; 8750.6,4067.9 8767.5,4067.9 ; 8750.6,4069.2 8766.2,4069.2 ; 8750.6,4070.5 8764.9,4070.5 ; 8750.6,4071.8 8763.6,4071.8 ; 8750.6,4073.1 8763.6,4073.1 ; 8750.6,4074.4 8762.3,4074.4 ; 8750.6,4078.3 8761,4078.3 ; 8750.6,4079.6 8759.7,4079.6 ; 8750.6,4080.9 8759.7,4080.9 ; 8750.6,4082.2 8758.4,4082.2 ; 8750.6,4083.5 8758.4,4083.5 ; 8750.6,4084.8 8758.4,4084.8 ; 8750.6,4086.1 8757.1,4086.1 ; 8750.6,4087.4 8757.1,4087.4 ; 8750.6,4088.7 8755.8,4088.7 ; 8750.6,4090 8755.8,4090 ; 8750.6,4091.3 8755.8,4091.3 ; 8750.6,4092.6 8754.5,4092.6 ; 8750.6,4177.1 8793.5,4177.1 ; 8750.6,4212.2 8754.5,4212.2 ; 8750.6,4213.5 8755.8,4213.5 ; 8750.6,4214.8 8755.8,4214.8 ; 8751.9,4001.6 9027.5,4001.6 ; 8751.9,4058.8 9011.9,4058.8 ; 8751.9,4060.1 9009.3,4060.1 ; 8751.9,4093.9 8754.5,4093.9 ; 8751.9,4095.2 8754.5,4095.2 ; 8751.9,4216.1 8755.8,4216.1 ; 8751.9,4217.4 8757.1,4217.4 ; 8751.9,4218.7 8757.1,4218.7 ; 8753.2,4056.2 9021,4056.2 ; 8753.2,4057.5 9017.1,4057.5 ; 8753.2,4178.4 8796.1,4178.4 ; 8753.2,4220 8757.1,4220 ; 8753.2,4221.3 8758.4,4221.3 ; 8753.2,4311 8770.1,4311 ; 8754.5,3987.3 8755.8,3987.3 ; 8754.5,4052.3 9027.5,4052.3 ; 8754.5,4053.6 9027.5,4053.6 ; 8754.5,4054.9 9024.9,4054.9 ; 8754.5,4179.7 8800,4179.7 ; 8754.5,4222.6 8759.7,4222.6 ; 8755.8,4002.9 9027.5,4002.9 ; 8755.8,4049.7 9027.5,4049.7 ; 8755.8,4051 9027.5,4051 ; 8755.8,4181 8801.3,4181 ; 8755.8,4223.9 8761,4223.9 ; 8755.8,4225.2 8762.3,4225.2 ; 8755.8,4229.1 8757.1,4229.1 ; 8757.1,3988.6 9027.5,3988.6 ; 8757.1,4048.4 9027.5,4048.4 ; 8757.1,4226.5 8763.6,4226.5 ; 8758.4,4004.2 9027.5,4004.2 ; 8758.4,4045.8 9027.5,4045.8 ; 8758.4,4047.1 9027.5,4047.1 ; 8758.4,4182.3 8805.2,4182.3 ; 8758.4,4227.8 8770.1,4227.8 ; 8759.7,4044.5 9027.5,4044.5 ; 8759.7,4183.6 8806.5,4183.6 ; 8759.7,4229.1 8771.4,4229.1 ; 8759.7,4312.3 8768.8,4312.3 ; 8761,4005.5 9027.5,4005.5 ; 8761,4043.2 9027.5,4043.2 ; 8761,4230.4 8771.4,4230.4 ; 8762.3,4006.8 9027.5,4006.8 ; 8762.3,4040.6 9027.5,4040.6 ; 8762.3,4041.9 9027.5,4041.9 ; 8762.3,4184.9 8811.7,4184.9 ; 8763.6,4008.1 9027.5,4008.1 ; 8763.6,4039.3 9027.5,4039.3 ; 8763.6,4186.2 8816.9,4186.2 ; 8763.6,4313.6 8768.8,4313.6 ; 8763.6,4314.9 8768.8,4314.9 ; 8763.6,4318.8 8764.9,4318.8 ; 8764.9,4038 9027.5,4038 ; 8764.9,4187.5 8819.5,4187.5 ; 8764.9,4218.7 8770.1,4218.7 ; 8764.9,4220 8770.1,4220 ; 8764.9,4221.3 8770.1,4221.3 ; 8764.9,4222.6 8770.1,4222.6 ; 8764.9,4223.9 8770.1,4223.9 ; 8764.9,4225.2 8770.1,4225.2 ; 8764.9,4226.5 8770.1,4226.5 ; 8764.9,4316.2 8767.5,4316.2 ; 8764.9,4317.5 8766.2,4317.5 ; 8766.2,3987.3 9027.5,3987.3 ; 8766.2,4009.4 9027.5,4009.4 ; 8766.2,4010.7 9027.5,4010.7 ; 8766.2,4036.7 9027.5,4036.7 ; 8766.2,4142 8811.7,4142 ; 8766.2,4143.3 8796.1,4143.3 ; 8766.2,4144.6 8796.1,4144.6 ; 8766.2,4188.8 8823.4,4188.8 ; 8766.2,4214.8 8775.3,4214.8 ; 8766.2,4216.1 8772.7,4216.1 ; 8766.2,4217.4 8770.1,4217.4 ; 8766.2,4294.1 8772.7,4294.1 ; 8767.5,4012 9027.5,4012 ; 8767.5,4035.4 9027.5,4035.4 ; 8767.5,4140.7 8771.4,4140.7 ; 8767.5,4145.9 8805.2,4145.9 ; 8767.5,4147.2 8811.7,4147.2 ; 8767.5,4213.5 8793.5,4213.5 ; 8767.5,4231.7 8771.4,4231.7 ; 8767.5,4233 8772.7,4233 ; 8767.5,4234.3 8772.7,4234.3 ; 8767.5,4235.6 8772.7,4235.6 ; 8767.5,4292.8 8772.7,4292.8 ; 8768.8,4013.3 9027.5,4013.3 ; 8768.8,4014.6 9027.5,4014.6 ; 8768.8,4034.1 9027.5,4034.1 ; 8768.8,4139.4 8770.1,4139.4 ; 8768.8,4148.5 8816.9,4148.5 ; 8768.8,4190.1 8827.3,4190.1 ; 8768.8,4212.2 8788.3,4212.2 ; 8768.8,4236.9 8772.7,4236.9 ; 8768.8,4238.2 8772.7,4238.2 ; 8768.8,4239.5 8772.7,4239.5 ; 8768.8,4240.8 8774,4240.8 ; 8768.8,4242.1 8774,4242.1 ; 8768.8,4243.4 8774,4243.4 ; 8768.8,4244.7 8774,4244.7 ; 8768.8,4246 8772.7,4246 ; 8768.8,4247.3 8772.7,4247.3 ; 8768.8,4248.6 8772.7,4248.6 ; 8768.8,4269.4 8770.1,4269.4 ; 8768.8,4270.7 8771.4,4270.7 ; 8768.8,4272 8771.4,4272 ; 8768.8,4273.3 8771.4,4273.3 ; 8768.8,4287.6 8774,4287.6 ; 8768.8,4288.9 8774,4288.9 ; 8768.8,4290.2 8772.7,4290.2 ; 8768.8,4291.5 8772.7,4291.5 ; 8770.1,4015.9 9027.5,4015.9 ; 8770.1,4017.2 9027.5,4017.2 ; 8770.1,4018.5 8810.4,4018.5 ; 8770.1,4019.8 8796.1,4019.8 ; 8770.1,4032.8 9027.5,4032.8 ; 8770.1,4149.8 8823.4,4149.8 ; 8770.1,4151.1 8827.3,4151.1 ; 8770.1,4249.9 8772.7,4249.9 ; 8770.1,4251.2 8772.7,4251.2 ; 8770.1,4252.5 8772.7,4252.5 ; 8770.1,4253.8 8771.4,4253.8 ; 8770.1,4255.1 8771.4,4255.1 ; 8770.1,4274.6 8771.4,4274.6 ; 8770.1,4275.9 8772.7,4275.9 ; 8770.1,4277.2 8772.7,4277.2 ; 8770.1,4278.5 8772.7,4278.5 ; 8770.1,4279.8 8772.7,4279.8 ; 8770.1,4281.1 8772.7,4281.1 ; 8770.1,4282.4 8772.7,4282.4 ; 8770.1,4283.7 8774,4283.7 ; 8770.1,4285 8774,4285 ; 8770.1,4286.3 8774,4286.3 ; 8771.4,3986 9027.5,3986 ; 8771.4,4021.1 8787,4021.1 ; 8771.4,4022.4 8780.5,4022.4 ; 8771.4,4023.7 8775.3,4023.7 ; 8771.4,4025 8772.7,4025 ; 8771.4,4031.5 9027.5,4031.5 ; 8771.4,4152.4 8829.9,4152.4 ; 8771.4,4191.4 8832.5,4191.4 ; 8771.4,4210.9 8784.4,4210.9 ; 8772.7,4153.7 8832.5,4153.7 ; 8772.7,4192.7 8836.4,4192.7 ; 8774,4030.2 9027.5,4030.2 ; 8774,4155 8835.1,4155 ; 8775.3,3984.7 9027.5,3984.7 ; 8775.3,4194 8839,4194 ; 8776.6,4028.9 9027.5,4028.9 ; 8776.6,4140.7 8833.8,4140.7 ; 8776.6,4156.3 8849.4,4156.3 ; 8776.6,4195.3 8846.8,4195.3 ; 8777.9,4209.6 8779.2,4209.6 ; 8777.9,4456.6 8823.4,4456.6 ; 8779.2,3983.4 9027.5,3983.4 ; 8779.2,4027.6 9027.5,4027.6 ; 8779.2,4157.6 8793.5,4157.6 ; 8779.2,4196.6 8849.4,4196.6 ; 8780.5,4197.9 8866.3,4197.9 ; 8781.8,4026.3 9027.5,4026.3 ; 8781.8,4062.7 8785.7,4062.7 ; 8781.8,4158.9 8790.9,4158.9 ; 8781.8,4214.8 8823.4,4214.8 ; 8781.8,4455.3 8824.7,4455.3 ; 8783.1,3982.1 9027.5,3982.1 ; 8783.1,4139.4 8831.2,4139.4 ; 8783.1,4199.2 8866.3,4199.2 ; 8784.4,4160.2 8796.1,4160.2 ; 8784.4,4200.5 8866.3,4200.5 ; 8784.4,4454 8824.7,4454 ; 8785.7,3980.8 9027.5,3980.8 ; 8785.7,4025 9027.5,4025 ; 8785.7,4161.5 8801.3,4161.5 ; 8787,4201.8 8866.3,4201.8 ; 8787,4216.1 8803.9,4216.1 ; 8787,4452.7 8826,4452.7 ; 8788.3,4203.1 8866.3,4203.1 ; 8788.3,4451.4 8826,4451.4 ; 8789.6,3979.5 9027.5,3979.5 ; 8789.6,4162.8 8805.2,4162.8 ; 8789.6,4164.1 8790.9,4164.1 ; 8790.9,4023.7 9027.5,4023.7 ; 8790.9,4204.4 8866.3,4204.4 ; 8790.9,4217.4 8797.4,4217.4 ; 8790.9,4450.1 8827.3,4450.1 ; 8792.2,4164.1 8807.8,4164.1 ; 8792.2,4218.7 8796.1,4218.7 ; 8792.2,4448.8 8828.6,4448.8 ; 8793.5,3978.2 9027.5,3978.2 ; 8793.5,4205.7 8866.3,4205.7 ; 8793.5,4220 8794.8,4220 ; 8793.5,4447.5 8828.6,4447.5 ; 8794.8,4138.1 8827.3,4138.1 ; 8794.8,4213.5 8818.2,4213.5 ; 8794.8,4316.2 8846.8,4316.2 ; 8794.8,4317.5 8840.3,4317.5 ; 8794.8,4446.2 8828.6,4446.2 ; 8796.1,4165.4 8810.4,4165.4 ; 8796.1,4313.6 8813,4313.6 ; 8796.1,4314.9 8814.3,4314.9 ; 8796.1,4318.8 8840.3,4318.8 ; 8796.1,4320.1 8840.3,4320.1 ; 8796.1,4444.9 8829.9,4444.9 ; 8797.4,3976.9 9027.5,3976.9 ; 8797.4,4022.4 9027.5,4022.4 ; 8797.4,4207 8866.3,4207 ; 8797.4,4311 8811.7,4311 ; 8797.4,4312.3 8813,4312.3 ; 8797.4,4321.4 8811.7,4321.4 ; 8797.4,4322.7 8813,4322.7 ; 8797.4,4443.6 8829.9,4443.6 ; 8798.7,4093.9 8800,4093.9 ; 8798.7,4095.2 8803.9,4095.2 ; 8798.7,4096.5 8814.3,4096.5 ; 8798.7,4166.7 8815.6,4166.7 ; 8798.7,4212.2 8813,4212.2 ; 8798.7,4309.7 8810.4,4309.7 ; 8798.7,4324 8814.3,4324 ; 8798.7,4442.3 8831.2,4442.3 ; 8800,4097.8 8823.4,4097.8 ; 8800,4308.4 8809.1,4308.4 ; 8800,4325.3 8815.6,4325.3 ; 8800,4326.6 8816.9,4326.6 ; 8800,4439.7 8831.2,4439.7 ; 8800,4441 8831.2,4441 ; 8801.3,4099.1 8802.6,4099.1 ; 8801.3,4208.3 8866.3,4208.3 ; 8801.3,4304.5 8802.6,4304.5 ; 8801.3,4307.1 8815.6,4307.1 ; 8801.3,4327.9 8818.2,4327.9 ; 8801.3,4329.2 8819.5,4329.2 ; 8801.3,4437.1 8833.8,4437.1 ; 8801.3,4438.4 8832.5,4438.4 ; 8802.6,3975.6 9027.5,3975.6 ; 8802.6,4168 8816.9,4168 ; 8802.6,4305.8 8829.9,4305.8 ; 8802.6,4330.5 8820.8,4330.5 ; 8802.6,4434.5 8833.8,4434.5 ; 8802.6,4435.8 8833.8,4435.8 ; 8803.9,4099.1 8831.2,4099.1 ; 8803.9,4136.8 8824.7,4136.8 ; 8803.9,4303.2 8823.4,4303.2 ; 8803.9,4304.5 8827.3,4304.5 ; 8803.9,4331.8 8822.1,4331.8 ; 8803.9,4333.1 8823.4,4333.1 ; 8803.9,4433.2 8835.1,4433.2 ; 8805.2,4169.3 8820.8,4169.3 ; 8805.2,4216.1 8806.5,4216.1 ; 8805.2,4301.9 8816.9,4301.9 ; 8805.2,4334.4 8824.7,4334.4 ; 8805.2,4430.6 8836.4,4430.6 ; 8805.2,4431.9 8835.1,4431.9 ; 8806.5,3974.3 9027.5,3974.3 ; 8806.5,4021.1 8835.1,4021.1 ; 8806.5,4062.7 8810.4,4062.7 ; 8806.5,4100.4 8835.1,4100.4 ; 8806.5,4209.6 8866.3,4209.6 ; 8806.5,4300.6 8814.3,4300.6 ; 8806.5,4335.7 8827.3,4335.7 ; 8806.5,4337 8829.9,4337 ; 8806.5,4428 8837.7,4428 ; 8806.5,4429.3 8836.4,4429.3 ; 8807.8,3973 9027.5,3973 ; 8807.8,4299.3 8816.9,4299.3 ; 8807.8,4338.3 8832.5,4338.3 ; 8807.8,4424.1 8839,4424.1 ; 8807.8,4425.4 8837.7,4425.4 ; 8807.8,4426.7 8837.7,4426.7 ; 8809.1,4170.6 8822.1,4170.6 ; 8809.1,4216.1 8827.3,4216.1 ; 8809.1,4339.6 8854.6,4339.6 ; 8809.1,4421.5 8840.3,4421.5 ; 8809.1,4422.8 8839,4422.8 ; 8810.4,4298 8819.5,4298 ; 8810.4,4308.4 8811.7,4308.4 ; 8810.4,4340.9 8854.6,4340.9 ; 8810.4,4342.2 8854.6,4342.2 ; 8810.4,4418.9 8840.3,4418.9 ; 8810.4,4420.2 8840.3,4420.2 ; 8811.7,3970.4 8813,3970.4 ; 8811.7,4210.9 8866.3,4210.9 ; 8811.7,4296.7 8822.1,4296.7 ; 8811.7,4417.6 8840.3,4417.6 ; 8813,4062.7 9000.2,4062.7 ; 8813,4171.9 8826,4171.9 ; 8813,4321.4 8839,4321.4 ; 8813,4343.5 8854.6,4343.5 ; 8813,4344.8 8853.3,4344.8 ; 8813,4415 8841.6,4415 ; 8813,4416.3 8841.6,4416.3 ; 8814.3,3971.7 9027.5,3971.7 ; 8814.3,4157.6 8849.4,4157.6 ; 8814.3,4322.7 8839,4322.7 ; 8814.3,4346.1 8853.3,4346.1 ; 8814.3,4411.1 8842.9,4411.1 ; 8814.3,4412.4 8842.9,4412.4 ; 8814.3,4413.7 8841.6,4413.7 ; 8815.6,4173.2 8828.6,4173.2 ; 8815.6,4295.4 8841.6,4295.4 ; 8815.6,4314.9 8845.5,4314.9 ; 8815.6,4324 8837.7,4324 ; 8815.6,4347.4 8853.3,4347.4 ; 8815.6,4408.5 8842.9,4408.5 ; 8815.6,4409.8 8842.9,4409.8 ; 8816.9,3970.4 9027.5,3970.4 ; 8816.9,4064 8995,4064 ; 8816.9,4212.2 8865,4212.2 ; 8816.9,4313.6 8844.2,4313.6 ; 8816.9,4348.7 8853.3,4348.7 ; 8816.9,4405.9 8844.2,4405.9 ; 8816.9,4407.2 8844.2,4407.2 ; 8818.2,4158.9 8849.4,4158.9 ; 8818.2,4174.5 8831.2,4174.5 ; 8818.2,4217.4 8829.9,4217.4 ; 8818.2,4301.9 8819.5,4301.9 ; 8818.2,4307.1 8833.8,4307.1 ; 8818.2,4312.3 8841.6,4312.3 ; 8818.2,4325.3 8845.5,4325.3 ; 8818.2,4403.3 8844.2,4403.3 ; 8818.2,4404.6 8844.2,4404.6 ; 8819.5,4142 8836.4,4142 ; 8819.5,4311 8840.3,4311 ; 8819.5,4326.6 8844.2,4326.6 ; 8819.5,4350 8853.3,4350 ; 8819.5,4351.3 8852,4351.3 ; 8819.5,4400.7 8844.2,4400.7 ; 8819.5,4402 8844.2,4402 ; 8820.8,4175.8 8833.8,4175.8 ; 8820.8,4213.5 8865,4213.5 ; 8820.8,4218.7 8831.2,4218.7 ; 8820.8,4294.1 8837.7,4294.1 ; 8820.8,4309.7 8837.7,4309.7 ; 8820.8,4327.9 8842.9,4327.9 ; 8820.8,4396.8 8845.5,4396.8 ; 8820.8,4398.1 8845.5,4398.1 ; 8820.8,4399.4 8845.5,4399.4 ; 8822.1,4065.3 8991.1,4065.3 ; 8822.1,4101.7 8839,4101.7 ; 8822.1,4160.2 8849.4,4160.2 ; 8822.1,4352.6 8852,4352.6 ; 8822.1,4394.2 8845.5,4394.2 ; 8822.1,4395.5 8845.5,4395.5 ; 8823.4,4177.1 8850.7,4177.1 ; 8823.4,4220 8833.8,4220 ; 8823.4,4308.4 8836.4,4308.4 ; 8823.4,4329.2 8841.6,4329.2 ; 8823.4,4353.9 8852,4353.9 ; 8823.4,4391.6 8846.8,4391.6 ; 8823.4,4392.9 8846.8,4392.9 ; 8824.7,4143.3 8839,4143.3 ; 8824.7,4161.5 8849.4,4161.5 ; 8824.7,4387.7 8846.8,4387.7 ; 8824.7,4389 8846.8,4389 ; 8824.7,4390.3 8846.8,4390.3 ; 8826,4178.4 8850.7,4178.4 ; 8826,4330.5 8837.7,4330.5 ; 8826,4355.2 8852,4355.2 ; 8826,4385.1 8848.1,4385.1 ; 8826,4386.4 8846.8,4386.4 ; 8827.3,4162.8 8849.4,4162.8 ; 8827.3,4214.8 8863.7,4214.8 ; 8827.3,4221.3 8835.1,4221.3 ; 8827.3,4383.8 8848.1,4383.8 ; 8828.6,4103 8842.9,4103 ; 8828.6,4144.6 8840.3,4144.6 ; 8828.6,4179.7 8852,4179.7 ; 8828.6,4222.6 8835.1,4222.6 ; 8828.6,4249.9 8832.5,4249.9 ; 8828.6,4251.2 8829.9,4251.2 ; 8828.6,4292.8 8829.9,4292.8 ; 8828.6,4356.5 8850.7,4356.5 ; 8828.6,4381.2 8848.1,4381.2 ; 8828.6,4382.5 8848.1,4382.5 ; 8829.9,4018.5 9027.5,4018.5 ; 8829.9,4066.6 8987.2,4066.6 ; 8829.9,4067.9 8982,4067.9 ; 8829.9,4164.1 8849.4,4164.1 ; 8829.9,4248.6 8833.8,4248.6 ; 8829.9,4378.6 8848.1,4378.6 ; 8829.9,4379.9 8848.1,4379.9 ; 8831.2,4069.2 8978.1,4069.2 ; 8831.2,4070.5 8974.2,4070.5 ; 8831.2,4071.8 8970.3,4071.8 ; 8831.2,4145.9 8841.6,4145.9 ; 8831.2,4165.4 8849.4,4165.4 ; 8831.2,4223.9 8836.4,4223.9 ; 8831.2,4246 8836.4,4246 ; 8831.2,4247.3 8836.4,4247.3 ; 8831.2,4376 8848.1,4376 ; 8831.2,4377.3 8848.1,4377.3 ; 8832.5,4104.3 8845.5,4104.3 ; 8832.5,4166.7 8849.4,4166.7 ; 8832.5,4181 8852,4181 ; 8832.5,4225.2 8837.7,4225.2 ; 8832.5,4226.5 8837.7,4226.5 ; 8832.5,4227.8 8839,4227.8 ; 8832.5,4234.3 8840.3,4234.3 ; 8832.5,4244.7 8837.7,4244.7 ; 8832.5,4373.4 8849.4,4373.4 ; 8832.5,4374.7 8848.1,4374.7 ; 8833.8,4073.1 8840.3,4073.1 ; 8833.8,4074.4 8837.7,4074.4 ; 8833.8,4075.7 8837.7,4075.7 ; 8833.8,4147.2 8842.9,4147.2 ; 8833.8,4168 8849.4,4168 ; 8833.8,4169.3 8849.4,4169.3 ; 8833.8,4170.6 8849.4,4170.6 ; 8833.8,4216.1 8862.4,4216.1 ; 8833.8,4229.1 8839,4229.1 ; 8833.8,4230.4 8839,4230.4 ; 8833.8,4231.7 8839,4231.7 ; 8833.8,4233 8839,4233 ; 8833.8,4236.9 8840.3,4236.9 ; 8833.8,4242.1 8839,4242.1 ; 8833.8,4243.4 8837.7,4243.4 ; 8833.8,4370.8 8849.4,4370.8 ; 8833.8,4372.1 8849.4,4372.1 ; 8835.1,4171.9 8849.4,4171.9 ; 8835.1,4173.2 8849.4,4173.2 ; 8835.1,4174.5 8849.4,4174.5 ; 8835.1,4175.8 8849.4,4175.8 ; 8835.1,4182.3 8853.3,4182.3 ; 8835.1,4235.6 8840.3,4235.6 ; 8835.1,4238.2 8849.4,4238.2 ; 8835.1,4239.5 8848.1,4239.5 ; 8835.1,4240.8 8845.5,4240.8 ; 8835.1,4249.9 8836.4,4249.9 ; 8835.1,4368.2 8849.4,4368.2 ; 8835.1,4369.5 8849.4,4369.5 ; 8836.4,4019.8 9027.5,4019.8 ; 8836.4,4105.6 8846.8,4105.6 ; 8836.4,4148.5 8844.2,4148.5 ; 8836.4,4296.7 8842.9,4296.7 ; 8836.4,4365.6 8849.4,4365.6 ; 8836.4,4366.9 8849.4,4366.9 ; 8837.7,4149.8 8845.5,4149.8 ; 8837.7,4183.6 8853.3,4183.6 ; 8837.7,4357.8 8850.7,4357.8 ; 8837.7,4363 8849.4,4363 ; 8837.7,4364.3 8849.4,4364.3 ; 8839,4021.1 9027.5,4021.1 ; 8839,4324 8845.5,4324 ; 8839,4360.4 8850.7,4360.4 ; 8839,4361.7 8850.7,4361.7 ; 8840.3,4106.9 8849.4,4106.9 ; 8840.3,4151.1 8846.8,4151.1 ; 8840.3,4152.4 8846.8,4152.4 ; 8840.3,4155 8848.1,4155 ; 8840.3,4184.9 8853.3,4184.9 ; 8840.3,4242.1 8841.6,4242.1 ; 8840.3,4298 8845.5,4298 ; 8840.3,4322.7 8846.8,4322.7 ; 8840.3,4359.1 8850.7,4359.1 ; 8841.6,4153.7 8848.1,4153.7 ; 8841.6,4236.9 8850.7,4236.9 ; 8841.6,4317.5 8845.5,4317.5 ; 8841.6,4318.8 8846.8,4318.8 ; 8841.6,4320.1 8846.8,4320.1 ; 8841.6,4321.4 8846.8,4321.4 ; 8842.9,4108.2 8850.7,4108.2 ; 8842.9,4299.3 8846.8,4299.3 ; 8844.2,4073.1 8966.4,4073.1 ; 8844.2,4109.5 8852,4109.5 ; 8844.2,4186.2 8853.3,4186.2 ; 8844.2,4300.6 8848.1,4300.6 ; 8844.2,4338.3 8854.6,4338.3 ; 8845.5,4337 8854.6,4337 ; 8846.8,4110.8 8853.3,4110.8 ; 8846.8,4235.6 8853.3,4235.6 ; 8846.8,4301.9 8850.7,4301.9 ; 8846.8,4334.4 8854.6,4334.4 ; 8846.8,4335.7 8854.6,4335.7 ; 8848.1,4074.4 8961.2,4074.4 ; 8848.1,4112.1 8854.6,4112.1 ; 8848.1,4234.3 8854.6,4234.3 ; 8848.1,4303.2 8852,4303.2 ; 8848.1,4333.1 8855.9,4333.1 ; 8849.4,4075.7 8956,4075.7 ; 8849.4,4113.4 8854.6,4113.4 ; 8849.4,4233 8855.9,4233 ; 8849.4,4304.5 8852,4304.5 ; 8849.4,4330.5 8855.9,4330.5 ; 8849.4,4331.8 8855.9,4331.8 ; 8850.7,4114.7 8854.6,4114.7 ; 8850.7,4305.8 8852,4305.8 ; 8850.7,4326.6 8857.2,4326.6 ; 8850.7,4327.9 8857.2,4327.9 ; 8850.7,4329.2 8855.9,4329.2 ; 8852,4077 8953.4,4077 ; 8852,4116 8854.6,4116 ; 8852,4231.7 8858.5,4231.7 ; 8852,4322.7 8858.5,4322.7 ; 8852,4324 8858.5,4324 ; 8852,4325.3 8857.2,4325.3 ; 8853.3,4078.3 8948.2,4078.3 ; 8853.3,4230.4 8862.4,4230.4 ; 8853.3,4318.8 8859.8,4318.8 ; 8853.3,4320.1 8859.8,4320.1 ; 8853.3,4321.4 8859.8,4321.4 ; 8854.6,4196.6 8866.3,4196.6 ; 8854.6,4229.1 8865,4229.1 ; 8854.6,4316.2 8861.1,4316.2 ; 8854.6,4317.5 8861.1,4317.5 ; 8855.9,4079.6 8945.6,4079.6 ; 8855.9,4312.3 8862.4,4312.3 ; 8855.9,4313.6 8862.4,4313.6 ; 8855.9,4314.9 8861.1,4314.9 ; 8857.2,4080.9 8940.4,4080.9 ; 8857.2,4227.8 8867.6,4227.8 ; 8857.2,4308.4 8863.7,4308.4 ; 8857.2,4309.7 8862.4,4309.7 ; 8857.2,4311 8862.4,4311 ; 8858.5,4195.3 8866.3,4195.3 ; 8858.5,4304.5 8865,4304.5 ; 8858.5,4305.8 8863.7,4305.8 ; 8858.5,4307.1 8863.7,4307.1 ; 8859.8,4082.2 8935.2,4082.2 ; 8859.8,4083.5 8931.3,4083.5 ; 8859.8,4194 8865,4194 ; 8859.8,4300.6 8866.3,4300.6 ; 8859.8,4301.9 8865,4301.9 ; 8859.8,4303.2 8865,4303.2 ; 8861.1,4084.8 8927.4,4084.8 ; 8861.1,4188.8 8863.7,4188.8 ; 8861.1,4191.4 8865,4191.4 ; 8861.1,4192.7 8865,4192.7 ; 8861.1,4226.5 8870.2,4226.5 ; 8861.1,4296.7 8866.3,4296.7 ; 8861.1,4298 8866.3,4298 ; 8861.1,4299.3 8866.3,4299.3 ; 8862.4,4086.1 8922.2,4086.1 ; 8862.4,4190.1 8865,4190.1 ; 8862.4,4291.5 8867.6,4291.5 ; 8862.4,4292.8 8867.6,4292.8 ; 8862.4,4294.1 8867.6,4294.1 ; 8862.4,4295.4 8867.6,4295.4 ; 8863.7,4087.4 8918.3,4087.4 ; 8863.7,4088.7 8914.4,4088.7 ; 8863.7,4286.3 8868.9,4286.3 ; 8863.7,4287.6 8868.9,4287.6 ; 8863.7,4288.9 8868.9,4288.9 ; 8863.7,4290.2 8868.9,4290.2 ; 8865,4090 8909.2,4090 ; 8865,4091.3 8906.6,4091.3 ; 8865,4225.2 8871.5,4225.2 ; 8865,4279.8 8870.2,4279.8 ; 8865,4281.1 8870.2,4281.1 ; 8865,4282.4 8870.2,4282.4 ; 8865,4283.7 8870.2,4283.7 ; 8865,4285 8870.2,4285 ; 8866.3,4092.6 8901.4,4092.6 ; 8866.3,4093.9 8897.5,4093.9 ; 8866.3,4095.2 8893.6,4095.2 ; 8866.3,4096.5 8888.4,4096.5 ; 8866.3,4119.9 8874.1,4119.9 ; 8866.3,4121.2 8874.1,4121.2 ; 8866.3,4122.5 8874.1,4122.5 ; 8866.3,4223.9 8871.5,4223.9 ; 8866.3,4273.3 8871.5,4273.3 ; 8866.3,4274.6 8871.5,4274.6 ; 8866.3,4275.9 8871.5,4275.9 ; 8866.3,4277.2 8871.5,4277.2 ; 8866.3,4278.5 8871.5,4278.5 ; 8867.6,4097.8 8885.8,4097.8 ; 8867.6,4099.1 8881.9,4099.1 ; 8867.6,4100.4 8878,4100.4 ; 8867.6,4101.7 8876.7,4101.7 ; 8867.6,4103 8875.4,4103 ; 8867.6,4110.8 8874.1,4110.8 ; 8867.6,4112.1 8874.1,4112.1 ; 8867.6,4113.4 8874.1,4113.4 ; 8867.6,4114.7 8874.1,4114.7 ; 8867.6,4116 8874.1,4116 ; 8867.6,4117.3 8874.1,4117.3 ; 8867.6,4118.6 8874.1,4118.6 ; 8867.6,4123.8 8874.1,4123.8 ; 8867.6,4125.1 8874.1,4125.1 ; 8867.6,4265.5 8872.8,4265.5 ; 8867.6,4266.8 8872.8,4266.8 ; 8867.6,4268.1 8872.8,4268.1 ; 8867.6,4269.4 8872.8,4269.4 ; 8867.6,4270.7 8872.8,4270.7 ; 8867.6,4272 8871.5,4272 ; 8868.9,4104.3 8875.4,4104.3 ; 8868.9,4105.6 8875.4,4105.6 ; 8868.9,4106.9 8875.4,4106.9 ; 8868.9,4108.2 8874.1,4108.2 ; 8868.9,4109.5 8874.1,4109.5 ; 8868.9,4126.4 8874.1,4126.4 ; 8868.9,4127.7 8874.1,4127.7 ; 8868.9,4129 8874.1,4129 ; 8868.9,4130.3 8874.1,4130.3 ; 8868.9,4131.6 8874.1,4131.6 ; 8868.9,4132.9 8874.1,4132.9 ; 8868.9,4134.2 8874.1,4134.2 ; 8868.9,4135.5 8874.1,4135.5 ; 8868.9,4136.8 8874.1,4136.8 ; 8868.9,4138.1 8874.1,4138.1 ; 8868.9,4139.4 8875.4,4139.4 ; 8868.9,4140.7 8875.4,4140.7 ; 8868.9,4142 8875.4,4142 ; 8868.9,4143.3 8875.4,4143.3 ; 8868.9,4222.6 8872.8,4222.6 ; 8868.9,4259 8874.1,4259 ; 8868.9,4260.3 8874.1,4260.3 ; 8868.9,4261.6 8874.1,4261.6 ; 8868.9,4262.9 8874.1,4262.9 ; 8868.9,4264.2 8872.8,4264.2 ; 8870.2,4144.6 8875.4,4144.6 ; 8870.2,4145.9 8875.4,4145.9 ; 8870.2,4147.2 8876.7,4147.2 ; 8870.2,4218.7 8872.8,4218.7 ; 8870.2,4220 8872.8,4220 ; 8870.2,4221.3 8872.8,4221.3 ; 8870.2,4253.8 8876.7,4253.8 ; 8870.2,4255.1 8875.4,4255.1 ; 8870.2,4256.4 8875.4,4256.4 ; 8870.2,4257.7 8875.4,4257.7 ; 8871.5,4148.5 8876.7,4148.5 ; 8871.5,4149.8 8876.7,4149.8 ; 8871.5,4151.1 8876.7,4151.1 ; 8871.5,4214.8 8872.8,4214.8 ; 8871.5,4216.1 8872.8,4216.1 ; 8871.5,4217.4 8872.8,4217.4